# Altium PCB PROC091F_ASCII.PcbDoc (part 6 of 7)
Units mil, origin at the board's own origin, x right, y up, seen from the top; angles counter-clockwise.
Board outline 3590.95 x 906.17 mil, 8 copper layers (Top Layer, GND1, Sig1, PWR1, PWR2, Sig2, GND2, Bottom Layer), stack 63.146 mil thick; 420 components, 316 nets, 1432 pads, 774 vias.
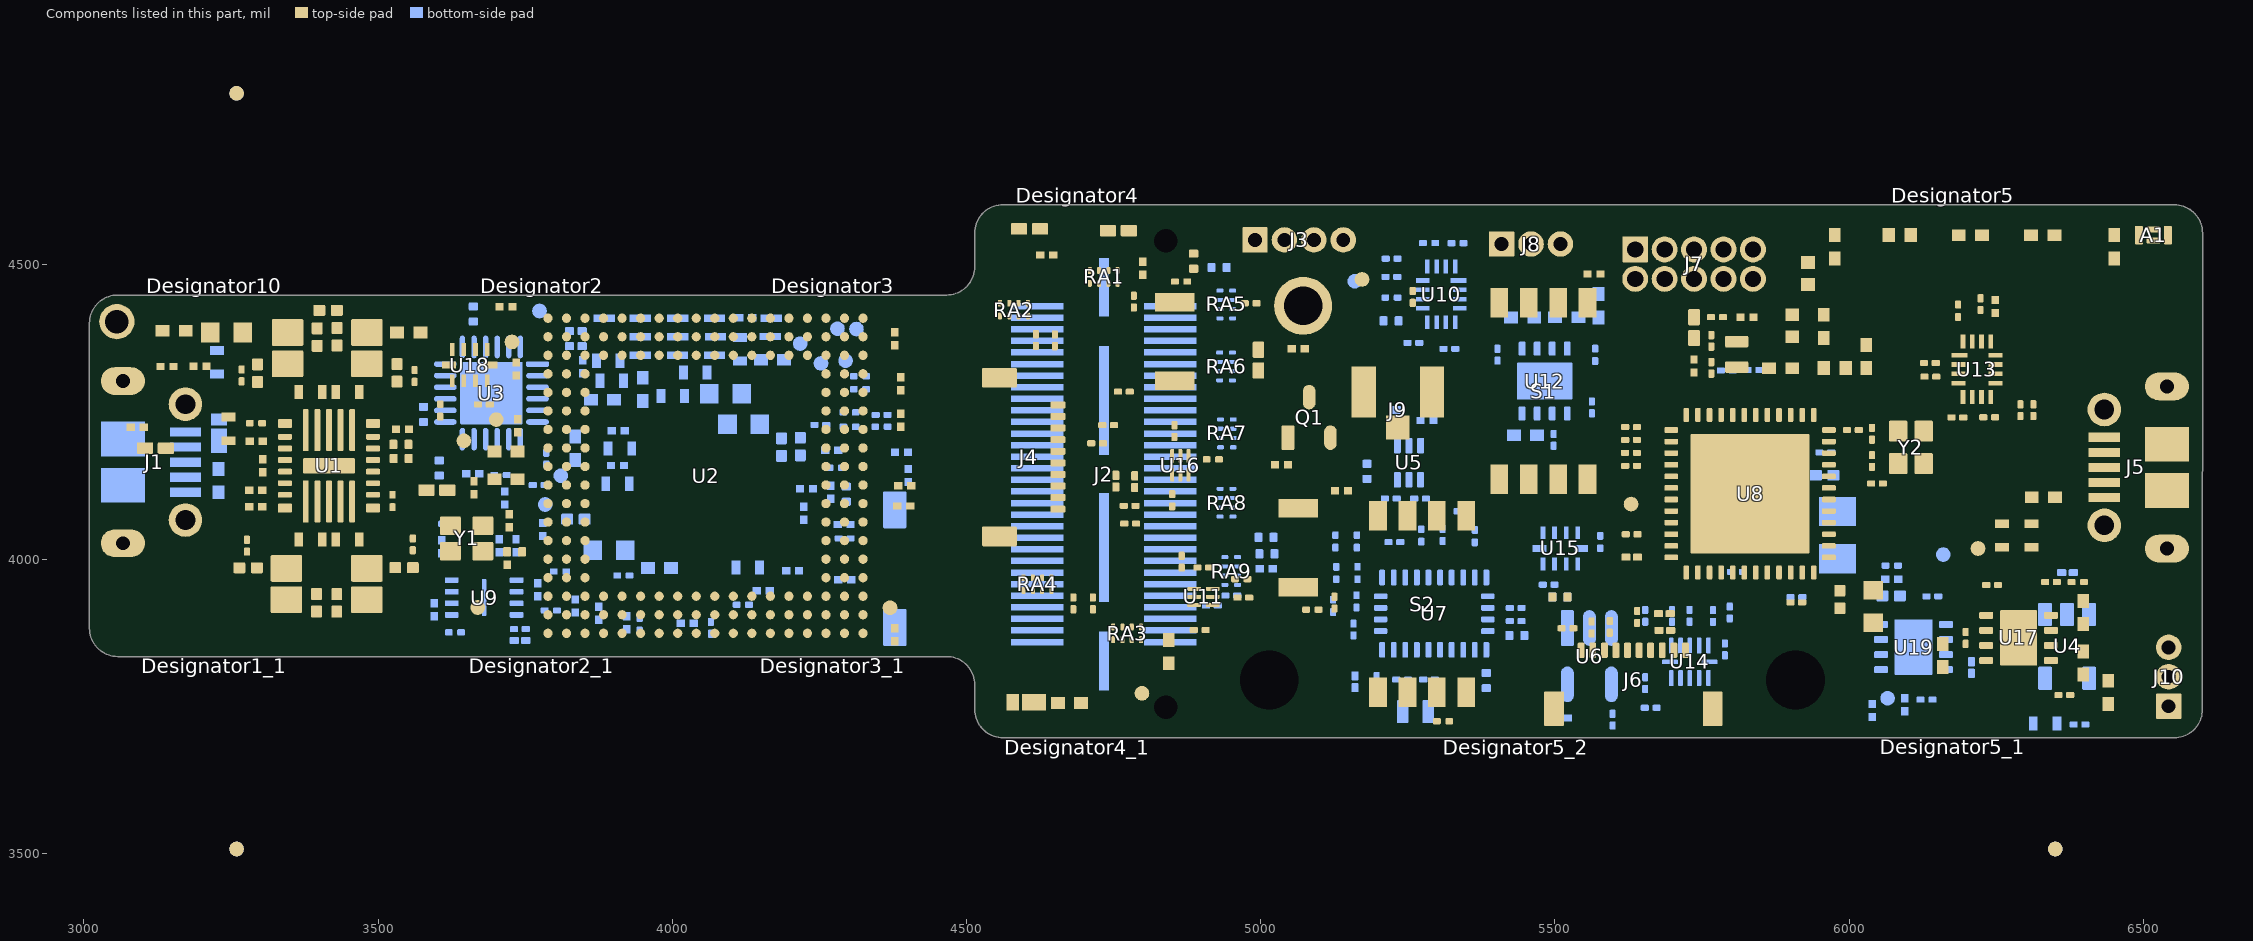
[diagram p12: the components of this part, seen from the top]

## Via types
v1: diameter 18, hole 8, Top Layer to Bottom Layer, tented both sides, 737 vias
v2: diameter 19.68, hole 7.87, Top Layer to Bottom Layer, tented both sides, 36 vias
v3: diameter 17, hole 8, Top Layer to Bottom Layer, tented both sides, 1 vias

## Nets (pads, with @x,y where several pads share a name; then routed paths per layer and width w, separated by ;. In a path a pad name is that pad's centre, name@x,y a point inside that pad or via, vN(x,y) a via of type N, cw(c..) or ccw(c..) an arc to the next point about the centre after c; other vN are vias at no path point) (continued)
pads on no net: A1.2-3 A1.5-6 Designator1. Designator1_1. Designator2. Designator2_1. Designator3. Designator3_1. Designator4. Designator4_1. Designator5. Designator5_1. Designator5_2. Designator6. Designator7. Designator8. Designator10. Designator22_1. Designator23. FID1.1 FID2.1 FID3.1 FID4.1 FID5.1 FID6.1 J1.4 J2.1 J2.3 J2.4 J2.5 J2.6 J2.7 J2.9 J2.MH1 J2.MH2 J4.4 J5.2 J5.3 J5.4 J6.4 J9.2@5173.9,4283.6 J9.3@5292.01,4283.6 RA2.1 RA2.8 RA5.4 RA5.5 S2.4 S2.5 U1. U2.A3 U2.A4 U2.B3 U2.B4 U2.B5 U2.C3 U2.C4 U2.C5 U3.10 U3.11 U3.14 U3.15 U3.16 U3.18 U3.19 U3.21 U3.22 U3.23 U3.24 U7.1 U7.7 U7.8 U7.12 U7.13 U7.15 U7.16 U7.18 U7.21 U7.22 U7.23 U7.24 U8.5 U8.6 U8.9 U8.10 U8.12 U8.18 U8.19 U8.20 U8.28 U8.32 U8.36 U8.37 U8.38 U8.39 U8.40 U8.41 U8.42 U8.43 U12.9@5457.58,4302.51 U12.9@5507.58,4302.51 U17.9@6287.97,3841 U17.9@6287.97,3891 U19.9@6109.37,3825.66 U19.9@6109.37,3875.27

## Polygon pours and split planes (outlines as drawn)
RE on Top Layer "Top Layer-RE" (solid, remove dead copper, pour order 493): 6540.72,4398.89 6564.34,4398.89 6564.34,4587.86 6540.72,4587.86
5V_IN_B on Top Layer "Top Layer-5V_IN_B" (solid, remove dead copper, pour order 491): 6197,4124 6206,4133 6276,4133 6318,4133 6325,4126 6325,4051 6321,4047 6205,4047 6197,4055
USB_5V_B on Top Layer "Top Layer-USB_5V_B" (solid, remove dead copper, pour order 489): 6338,4138.4 6378.89,4138.4 6395.42,4121.87 6402.92,4114.37 6470,4114.37 6476,4108.37 6476,4096.37 6471,4091.37 6338,4091.37 6338,4113.37
no net on Top Layer "Top Layer-No Net" (solid, remove dead copper, pour order 477): 6335,4190
GND on Top Layer " " (solid, remove dead copper, pour order 428): 6462.4,4602.09 6462.4,4476 6094.58,4476 6094.58,4239.36 5840,4239.36 5840,4602.01
GND on Top Layer " " (solid, remove dead copper, pour order 495): 6117.79,4247.89 6117.79,4457 6461.9,4457 6461.9,4318.4 6592,4318.4 6592,3727 6558.63,3693.63 6491,3693.63 4391.1,3693.98 4391.1,4599.81 5818.71,4599.81 5818.71,4287.56 5894.15,4212.11 6082.01,4212.11
GND on Top Layer " " (solid, remove dead copper, pour order 465): 3261.1,4211.1 3261.1,4188.61 3268.49,4181.22 3268.49,4153.29 3150.01,4153.29 3125.63,4177.67 3125.63,4270.32 3146.11,4290.8 3191.47,4290.8 3203.02,4279.24 3203.02,4230.58 3222.51,4211.1
PMICVIO_3V3 on Top Layer " " (solid, remove dead copper, pour order 463): 3143.65,4360.8 3179.4,4360.8 3193.27,4346.93 3193.27,4314.78 3144.6,4314.78 3143.39,4315.99
PMICOUT_3V3 on Top Layer " " (solid, remove dead copper, pour order 461): 4333.76,4153.15 4380.42,4153.15 4392.49,4141.09 4392.49,4117.8 4344.94,4117.8 4327.78,4134.97 4327.78,4146.94 4333.32,4152.48
GND on Top Layer " " (solid, remove dead copper, pour order 446): 4191,4208.15 4106.33,4292.82 3921,4292.82 3921,4016 4191,4016
GND on Top Layer " " (solid, remove dead copper, pour order 430): 3400.13,4047.5 3434.09,4047.5 3435.21,4046.38 3435.21,4007.29 3442,4000.5 3442,3933.2 3386,3933.2 3386,3994.7 3399,4007.7 3399.01,4045.26
GND on Top Layer " " (solid, remove dead copper, pour order 166): 3388.3,4371 3388.3,4316.69 3398.15,4306.84 3398.15,4268.85 3434.85,4269.05 3434.85,4310.34 3441,4316.49 3441,4371
GND on Top Layer " " (solid, remove dead copper, pour order 420): 5383.62,4493.86 5529.19,4493.86 5539.3,4483.75 5539.3,4470.64 5524.82,4456.16 5524.82,4413.01 5517.99,4406.18 5384.16,4406.18 5383.88,4405.9
PMICOUT_3V3 on Top Layer " " (solid, remove dead copper, pour order 396): 3578.7,4436.4 3583.4,4431.7 3583.4,4424.1 3588.9,4418.6 3588.9,4371.27 3557.7,4371.27 3557.7,4405 3541.7,4421 3541.7,4433.07 3545.03,4436.4
PMIC_1V2_FILTERED on Top Layer " " (solid, remove dead copper, pour order 376): 3100.9,4430.37 3096,4425.47 3096,4368.8 3102.63,4361.9 3134.6,4361.9 3149.8,4377.1 3149.8,4430.37
AR_1P2 on Top Layer " " (solid, remove dead copper, pour order 370): 3160.7,4373.3 3191.2,4373.3 3196.93,4367.57 3234.2,4367.57 3234.2,4428 3160.7,4428
PMIC_1V2 on Top Layer "Bottom Layer-PMIC_1V2" (solid, pour order 334): 3406.3,4384 3406.3,4410 3409.8,4413.4 3409.8,4433.17 3252.6,4433.16 3252.6,4361.52 3382,4361.52 3382,4375.99 3390.01,4384
PMIC_1V8 on Top Layer "Bottom Layer-PMIC_1V8" (solid, pour order 338): 3405.2,3921 3372,3921 3372,3952.1 3314,3952.1 3314,3863.25 3405.2,3863.25
5V_IN on Top Layer "Bottom Layer-5V_IN 2" (solid, pour order 346): 3332.61,4303.52 3332.61,4262.52 3372.61,4262.52 3374.61,4264.52 3374.61,4300.52 3371.61,4303.52
PMIC_3V3 on Top Layer "Bottom Layer-PMIC_3V3" (solid, pour order 336): 3539.58,4362.4 3545,4367.82 3545,4380.81 3545,4400.1 3537.2,4407.9 3420,4407.9 3420,4362.4
PMIC_1V0 on Top Layer "Bottom Layer-PMIC_1V0 1" (solid, pour order 340): 3456.41,3953.57 3456.41,3921 3420.5,3921 3420.5,3861.73 3569.79,3861.73 3569.79,3953.57
5V_IN on Top Layer "Bottom Layer-5V_IN 3" (solid, pour order 344): 3332.61,4053.02 3332.61,4012.02 3372.61,4012.02 3374.61,4014.02 3374.61,4050.02 3371.61,4053.02
5V_IN on Top Layer "Bottom Layer-5V_IN 1" (solid, pour order 352): 3500.61,4264.02 3500.61,4305.02 3460.61,4305.02 3458.61,4303.02 3458.61,4267.02 3461.61,4264.02
5V_IN on Top Layer "Bottom Layer-5V_IN 4" (solid, pour order 342): 3500.61,4013.52 3500.61,4054.52 3460.61,4054.52 3458.61,4052.52 3458.61,4016.52 3461.61,4013.52
5V_IN on Top Layer "Top Layer-5V_IN" (solid, pour order 368): 3203.3,4295.75 3209.51,4289.54 3209.51,4241.99 3217.3,4234.2 3221.47,4230.03 3264.77,4230.03 3264.77,4249.23 3264.77,4343.3 3203.3,4343.3
PMICOUT_3V3 on Top Layer "TOP-PMICOUT_3V3" (solid, remove dead copper, pour order 194): 4858.29,3846.65 4858.29,3928.41 4858.29,3946.33 4808.29,3996.33 4773.82,3996.33 4767,3989.51 4767,3934.57 4808.29,3893.28 4808.29,3853.17 4814.8,3846.65
5V_IN on Top Layer "TOP-5V_IN 1" (solid, pour order 184): 4527.77,3777.41 4588.97,3777.41 4588.97,3712.81 4527.77,3712.81
NetD2_2 on Top Layer "TOP-NetD2_2" (solid, pour order 180): 4603.5,3789.43 4657.11,3789.43 4668.11,3778.43 4668.11,3724.76 4662.83,3719.49 4610.48,3719.49 4603.5,3726.47
no net on Top Layer "TOP-No Net 2" (solid, pour order 332): 6159.44,4021.48
VCC_BA_3V3 on Top Layer "TOP-VCC_BA_3V3" (solid, pour order 186): 4830.39,3829.83 4860.96,3829.83 4860.96,3775.05 4859.25,3773.34 4827.36,3773.34 4814.82,3785.87 4814.82,3822.44 4822.21,3829.83
5V_IN_SW on Top Layer "TOP-5V_IN_SW" (solid, pour order 182): 4687.48,3786.45 4727.09,3786.45 4741.77,3771.77 4741.77,3725.03 4724.97,3708.22 4682.94,3708.22 4682.94,3781.58
no net on Top Layer "TOP-No Net" (solid, pour order 178): 6163.15,4205.41
RE on Bottom Layer "Bottom Layer-RE" (solid, remove dead copper, pour order 499): 6564.31,4399 6540.69,4399 6540.69,4587.98 6564.31,4587.98
GND on Bottom Layer " " (solid, remove dead copper, pour order 483): 6460,4317.9 6593,4317.9 6593,3722 6567.2,3696.2 6403.68,3696.2 4390.55,3696.54 4390.55,4602.37 6460,4602.37
PMIC_1V0 on Bottom Layer "Bottom Layer-PMIC_1V0" (solid, remove dead copper, pour order 208): 4092.38,4270.62 4099,4264 4117.89,4264 4130.35,4251.54 4130.35,4214.97 4133.62,4211.53 4157.89,4211.53 4176.45,4193.57 4223.58,4193.57 4229.44,4199.44 4229.44,4211.53 4229.44,4293.05 4202.46,4320.04 4092.38,4320.04
GND on Bottom Layer " " (solid, remove dead copper, pour order 475): 3855.4,4434.66 3943.27,4434.66 3943.27,4354.12 3904.58,4354.12 3889.38,4338.92 3889.38,4292.14 3870.15,4292.14 3869.18,4293.11 3869.18,4319.97 3862.3,4326.86 3846.51,4326.86 3845.29,4328.08 3845.29,4344.09 3855.4,4354.2
VCLK_1V8 on Bottom Layer "BOTTOM-VCLK_1V8" (solid, remove dead copper, pour order 234): 3904.31,4184.76 3904.31,4177.71 3900.3,4173.7 3884.7,4173.7 3882.3,4176.1 3882.3,4183.63 3881.18,4184.76 3815,4184.76 3815,4324 3857.74,4324 3857.74,4292.99 3865.06,4285.68 3873.32,4285.68 3876,4282.72 3876,4231 3904.31,4231
GND on Bottom Layer "Bottom Layer-GND" (solid, remove dead copper, pour order 459): 4122.79,4434.87 4123.42,4403.12 4126.97,4399.57 4126.97,4327.5 4076.38,4327.5 4076.41,4434.87
GND on Bottom Layer "Bottom Layer-GND 1" (solid, remove dead copper, pour order 454): 4039.05,4265.4 4039.05,4433.84 4013.12,4433.84 4013.07,4265.4
GND on Bottom Layer "BOTTOM-GND 1" (solid, remove dead copper, pour order 220): 4223.9,4105.7 4227.1,4108.9 4227.1,4200.2 4065.46,4200.2 4065.46,4221.1 4061.14,4225.42 3946.37,4225.42 3946.37,4017.76 3948.37,4015.76 4203.3,4015.76 4203.3,4099.8 4209.2,4105.7
AR_1V8 on Bottom Layer " " (solid, remove dead copper, pour order 212): 3882,4229.79 3928.75,4229.79 3928.75,4280.65 3887.42,4280.65 3887.42,4264.15 3882,4258.74
no net on Bottom Layer " " (solid, remove dead copper, pour order 452): 4514.15,4464.37
GND on Bottom Layer " " (solid, remove dead copper, pour order 444): 3110.02,4464.37 3516.63,4464.37 3524,4457 3524,3995 3572,3947 3571,3946 3571,3834.46 3009.58,3834.46 3007,3837.04 3007,3956.14 3242.4,3956.14 3293,4006.74 3293,4336 3286,4343 3110.02,4343
5V_IN on Bottom Layer " " (solid, remove dead copper, pour order 442): 5372.93,4241.23 5372.93,4218.21 5399.81,4191.33 5443.81,4191.33 5443.81,4218.26 5420.84,4241.23
no net on Bottom Layer " " (solid, remove dead copper, pour order 440): 5395.85,4242.93
PMICOUT_3V3 on Bottom Layer "Bottom Layer-PMICOUT_3V3" (solid, remove dead copper, pour order 434): 4002.93,3945.37 4022.3,3925.99 4022.3,3871.07 4000.71,3849.47 3984.65,3849.47 3972.61,3861.52 3972.61,3890.23 3968.59,3894.25 3912.61,3894.25 3895.73,3911.13 3853.93,3911.13 3842.3,3922.76 3794.48,3922.76 3794.48,3968.8 3849.6,3968.8 3849.6,3945.37
GND on Bottom Layer "TOP-GND 1" (solid, remove dead copper, pour order 432): 3201.16,4249.63 3201.16,4448.76 3021.38,4448.76 3021.38,3991.45 3045.02,3967.81 3228.75,3967.81 3240.08,3979.14 3240.08,4092.57 3213.15,4119.5 3114.15,4119.5 3110.56,4123.1 3110.56,4154.46 3110.56,4243.98 3116.94,4250.83 3141.88,4250.83 3152.4,4240.31 3191.84,4240.31
no net on Bottom Layer " " (solid, remove dead copper, pour order 416): 3587.57,4371.27
no net on Bottom Layer " " (solid, remove dead copper, pour order 398): 3587.57,4371.27
AR_1V8 on Bottom Layer "Bottom Layer-AR_1V8" (solid, pour order 374): 4178,4325.46 4178,4351.06 4242.56,4351.06 4255.37,4338.24 4255.37,4320.81 4205.03,4320.81 4200.37,4325.46
5V_IN on Bottom Layer "Bottom Layer-5V_IN" (solid, remove dead copper, pour order 372): 3207,4317 3207,4299.06 3201.77,4293.83 3201.77,4225.23 3275.77,4225.23 3275.77,4322.2 3212.2,4322.2
NetD1_2 on Bottom Layer "Bottom Layer-NetD1_2" (solid, remove dead copper, pour order 354): 3205.06,4138.73 3205.06,4217.16 3252.84,4217.16 3252.84,4138.73
USB_5V on Bottom Layer "Bottom Layer-USB_5V" (solid, remove dead copper, pour order 326): 3143.37,4122.78 3209.76,4122.78 3213.9,4126.93 3240.58,4126.93 3240.58,4086.12 3208.69,4086.12 3196.02,4098.78 3143.37,4098.78
PMIC_1V8 on Bottom Layer "BOTTOM-PMIC_1V8 1" (solid, remove dead copper, pour order 214): 3872.59,3942.39 3887.8,3957.6 3887.8,3967.64 3887.8,3992.9 3884.12,3996.58 3884.12,4079.43 3838.37,4079.43 3838.37,3998.24 3838.37,3979.64 3838.88,3963.12 3859.61,3942.39
BB_1V8 on Bottom Layer "Bottom Layer-BB_1V8" (solid, remove dead copper, pour order 324): 4129.35,4407.73 4135.08,4402.01 4135.08,4354.75 4127.11,4346.78 4103.27,4346.78 4103.27,4328.02 4162.87,4328.02 4162.87,4434.77 4129.35,4434.77
AR_VOUT_PA on Bottom Layer "Bottom Layer-AR_VOUT_PA" (solid, remove dead copper, pour order 322): 3901.93,4289 3973.82,4289 3973.82,4434.64 3948.08,4434.64 3948.08,4351 3901.93,4351
AR_1P0_RF2 on Bottom Layer "Bottom Layer-AR_1P0_RF2" (solid, remove dead copper, pour order 318): 3963.8,4285.5 3972.6,4294.3 3972.6,4316.74 3979.83,4323.97 3979.83,4434.54 4004.92,4434.54 4004.92,4266.88 4013.78,4258.02 4110.46,4258.02 4110.46,4211.45 3938.58,4211.45 3938.58,4285.5
AR_1P0_RF1 on Bottom Layer "Bottom Layer-AR_1P0_RF1" (solid, remove dead copper, pour order 316): 4078.8,4266.48 4078.8,4328.27 4069.71,4337.42 4069.71,4434.87 4047.32,4434.87 4047.32,4266.48
VCO_1V8 on Bottom Layer "BOTTOM-VCO_1V8" (solid, remove dead copper, pour order 216): 3877.1,4169.4 3879.6,4166.9 3880.7,4166.83 3904,4166.83 3904,4115.29 3858.83,4115.29 3841.37,4132.76 3841.37,4145.76 3834.37,4152.76 3823.37,4152.76 3823.37,4182.24 3872.16,4182.24 3877.1,4177.3
5V_IN_SW on Bottom Layer "BOTTOM-5V_IN_SW" (solid, pour order 314): 6204.14,3845.14 6152,3845.14 6152,3829.3 6184.9,3829.3 6194.46,3819.74 6201.27,3819.74 6214.64,3819.74 6227.76,3806.61 6228.14,3780.46 6259.4,3749.2 6306.1,3749.2 6314,3757.1 6314,3802 6309,3807 6289,3807 6270.12,3807 6265.37,3811.75 6265.37,3844 6261,3848 6207,3848
5V_HD_IN on Bottom Layer "BOTTOM-5V_HD_IN" (solid, pour order 312): 6136.34,3818.2 6186,3818.2 6198,3806.2 6198,3719.23 6186.95,3708.18 6148.42,3708.18 6136.34,3720.26
5V_IN_B on Bottom Layer "BOTTOM-5V_IN_B" (solid, pour order 266): 6150.95,3923.95 6168.05,3906.85 6178,3896.9 6177.89,3880.17 6174.12,3876.4 6145.16,3876.4 6145.15,3856.3 6204.5,3856.3 6224.8,3876.6 6224.8,3983.2 6267,4025.4 6267,4114 6261,4120 6190,4120 6183,4113 6183,4071.4 6147.37,4035.77 6147.37,3927.53 6149.7,3925.2
5V_HD_IN on Bottom Layer "BOTTOM-5V_HD_IN 1" (solid, pour order 264): 4798.68,3865.13 4891.75,3865.13 4895,3861.88 4895,3789.79 4874.5,3789.79 4874.5,3806.35 4853.33,3827.52 4799.46,3827.52 4791.67,3835.3 4791.67,3858.12
no net on Bottom Layer "BOTTOM-No Net 3" (solid, pour order 262): 4918.91,3816.49
no net on Bottom Layer "BOTTOM-No Net 4" (solid, pour order 254): 4983.76,3878.78
no net on Bottom Layer "BOTTOM-No Net" (solid, pour order 252): 4304.65,4371.57
no net on Bottom Layer "BOTTOM-No Net 1" (solid, remove dead copper, pour order 250): 4033.37,4452.75
VIOIN_1V8 on Bottom Layer "BOTTOM-VIOIN_1V8" (solid, remove dead copper, pour order 230): 3990.37,4003.76 4117.79,4003.76 4117.79,3965.76 3990.37,3965.76
AR_1V8 on Bottom Layer "BOTTOM-AR_1V8" (solid, remove dead copper, pour order 210): 3914,4112 3916.2,4109.8 3936.13,4109.8 3936.13,4014.99 3952.88,3998.24 3972.37,3998.24 3972.37,3968.76 3925.86,3968.76 3891.86,4002.75 3891.86,4112
5V_IN_SW on PWR1 "PWR1-5V_IN_SW" (solid, remove dead copper, pour order 380): 6460,4594 5576,4594 5576,4332 5573.19,4333.81 5443.38,4204 5342,4204 5168,4378 4799.73,4378 4635,4213.27 4635,3697.46 4787.37,3697.46 4787.37,4055.46 5593,4055.46 5685.13,4147.6 6063.4,4147.6 6208.37,4002.63 6208.37,3915.48 6208.37,3699.46 6212.37,3695.46 6600.27,3697.49 6600.27,4318.3 6460,4318.3
5V_IN on PWR1 " " (solid, remove dead copper, pour order 424): 4772.01,4379.61 5180.02,4379.61 5339.66,4219 5561.97,4219 5562.03,4602.1 4675.1,4602.1 4525.19,4452.19 4525.19,3711.47 4631,3711.47 4631,4238.6
PMIC_1V2_FILTERED on PWR1 " " (solid, remove dead copper, pour order 414): 3081.05,4368.79 3181.54,4368.79 3220.45,4329.88 3220.45,4278.41 3246.29,4253.3 4220.68,4253.3 4220.68,4082.23 3738.33,4082.23 3738.33,3834.46 4441,3834.46 4441,4479.05 3081.05,4479.05
PMIC_1V0 on PWR1 " " (solid, remove dead copper, pour order 410): 3579.52,3834.32 3706.3,3834.32 3728.18,3856.2 3728.18,3976.65 3735.92,3985.74 3753.02,4002.3 3785.58,4034.86 3816.78,4034.86 3823.42,4028.23 4160.28,4028.23 4217,4084.96 4217,4319.77 3964.71,4319.77 3942.89,4297.89 3709.16,4297.89 3549.35,4138.08 3549.76,4055.03 3427,4055.03 3427,3832.13
PMICVIO_3V3 on PWR1 " " (solid, remove dead copper, pour order 436): 3141.44,4363.71 3183.96,4363.71 3185.46,4362.21 3185.46,4340.46 3180.45,4335.44 3145.7,4335.44 3141.19,4339.96
5V_HD_IN on PWR1 "PWR1-5V_HD_IN" (solid, remove dead copper, pour order 366): 5560.3,4032.46 5616.87,4032.46 5709.3,4124.9 6042.1,4124.9 6200.37,3966.63 6200.37,3911.2 6200.37,3696.46 4809.37,3696.46 4809.37,4032.46
no net on PWR1 "L4 PWR/GND-No Net" (solid, pour order 364): 3990.62,3973.27
GND on Sig1 " " (solid, remove dead copper, pour order 422): 6460,4568 6486,4568 6486,4533 6460,4533 6460,4318.3 6578,4318.3 6578,3696.46 4514.15,3696.46 4514.15,4605.43 6460,4602.79
GND on Sig1 " " (solid, remove dead copper, pour order 457): 3009.58,4448.76 4380.91,4448.76 4380.91,3834.46 3009.58,3834.46
no net on Sig1 "Sig1-No Net" (solid, remove dead copper, pour order 467): 4088.43,4327.31
no net on Sig1 "L3 SIG 1-No Net" (solid, pour order 286): 3904.98,3968.25
GND on GND1 "GND1-GND" (solid, remove dead copper, pour order 358): 6461.95,4318.4 6592,4318.4 6592,3731 6557.46,3696.46 6403.15,3696.46 4522.29,3696.46 4522.29,3843 3009.59,3843 3010,4451.17 4522,4451.17 4522,4602.1 6462.12,4602.1
no net on GND1 "L6 SIG 2-No Net" (solid, pour order 302): 4825.92,3926.28
no net on GND1 "DVDD_21MP_1V8_L08_P-001" (solid, remove dead copper, pour order 300): 3885.7,4256.64
GND on Sig2 " " (solid, remove dead copper, pour order 438): 6460,4318.1 6587.8,4318.1 6587.8,3725.8 6558.46,3696.46 6403.68,3696.46 4514.15,3696.46 4514.15,4602.37 6460,4602.09
GND on Sig2 " " (solid, remove dead copper, pour order 455): 3009.58,3834.46 3009.58,4448.76 3879.97,4448.76 3880.04,4448.69 3880.04,4344.3 3857.77,4322.03 3857.77,4183.05 3837.69,4162.97 3514.11,4162.97 3449.26,4098.12 3449.26,3833.82
GND on Sig2 " " (solid, remove dead copper, pour order 450): 3946,4059 3946,4264 3971,4289 4166.06,4289 4180,4275.06 4180,4011 4161.3,4011 4128.3,3978 4046,3978 4046,4038 4031.47,4052.53 3952.19,4052.53 3952.19,4053.61 3950,4055.8
AR_1V8 on Sig2 " " (solid, remove dead copper, pour order 426): 3873,4353 4232,4353 4232,4303.36 4226.81,4298.16 3937.21,4298.16 3937.21,4036.72 3873,4036.72
PMICOUT_3V3 on Sig2 "Sig2-PMICOUT_3V3" (solid, remove dead copper, pour order 418): 3572.53,3970.25 3572.53,4012.87 3623.66,4064 3653.69,4094.03 3653.69,4152.2 3646.43,4159.46 3526.74,4159.46 3451.99,4084.71 3452,4019.78 3553.65,3918.12 3572.53,3899.24 3626.57,3899.24 3655.68,3870.12 3776.74,3870.12 3856.78,3950.17 3853.77,3950.17 3840.25,3963.68 3675.96,3963.68 3673.49,3961.21 3581.57,3961.21
GND on Sig2 "Sig2-GND" (solid, remove dead copper, pour order 356): 6403.37,3696.46
VCC_BA_3V3 on PWR2 "PWR2-VCC_BA_3V3" (solid, remove dead copper, pour order 487): 6460,4318.1 6590,4318.1 6590,3720.8 6565.66,3696.46 6403.15,3696.46 4514.14,3696.46 4514.15,4602.1 6460,4602.1
5V_IN on PWR2 " " (solid, remove dead copper, pour order 485): 4597,4100 4573.8,4123.2 4462.7,4122.8 4327.06,4122.8 4302,4147.86 4302,4211.85 4271.3,4229.17 3971.19,4229.17 3910.94,4289.43 3739.45,4289.43 3706.1,4256.08 3706.1,4178.63 3652.53,4125.06 3616.89,4125.06 3605.42,4136.53 3605.42,4222.9 3515.65,4312.67 3515.76,4378.01 3515.76,4432.4 3198.19,4432.4 3198.19,3952.63 3864.68,3952.63 3932.69,4020.64 4127.7,4020.64 4153.58,3994.76 4193.24,3994.76 4229.16,3958.84 4262.42,3957.75 4286.21,3957.75 4322,3921.96 4322,3876.09 4353.26,3844.83 4413.43,3844.83 4439.46,3818.81 4453.67,3818.32 4524.36,3818.32 4529.66,3813.02 4529.66,3715.56 4542.09,3703.14 4743.98,3703.14 4743.98,3847.78 4597,3994.76
PMIC_1V8 on PWR2 "PWR2-PMIC_1V8" (solid, remove dead copper, pour order 408): 3465.34,3966.41 3477.2,3978.26 3537.59,3978.27 3549.67,3966.41 3675.7,3966.41 3707.69,3998.39 3770.3,4061 3870.8,4061 3923.48,4008.32 3923.48,3971.82 3784.28,3832.62 3321.9,3832.62 3321.9,3939.88 3413.11,3939.88 3439.64,3966.41
PMICOUT_3V3 on PWR2 " " (solid, remove dead copper, pour order 402): 4579.6,4126.82 4610.8,4095.62 4611.23,4071.6 4610.88,3988.27 4674.1,3925.05 4803.53,3925.05 4803.53,4471.18 3554,4471.18 3533.3,4449.2 3533.3,4323.11 3545.61,4310.8 3545.61,4215 3545.94,4191.06 3601,4136 3647.82,4136 3683.51,4171.69 3683.51,4257.46 3728.27,4302.22 3926.07,4302.22 3988.19,4240.11 4270.16,4240.11 4301.92,4208.35 4301.92,4163.3 4332.23,4133 4415.98,4133 4422.16,4126.82
VIOIN_1V8 on PWR2 "PWR2-VIOIN_1V8" (solid, remove dead copper, pour order 382): 4282.76,3946.1 4220.49,3946.1 4182.83,3983.77 4150.56,3983.77 4124.13,4011.02 3956.82,4011.02 3876.24,3930.44 3806.05,3930.44 3784.21,3908.6 3784.21,3853.04 3800.87,3836.38 4223.5,3836.38 4269.97,3836.6 4310.66,3877.29 4310.66,3918.2
no net on PWR2 " " (solid, remove dead copper, pour order 406): 3419.66,3833.17
VDDS on PWR2 "PWR2-VDDS" (solid, remove dead copper, pour order 404): 5626.72,4273.46 6074.99,4273.46 6074.99,3989.08 6021.81,3935.9 5700.14,3935.9 5626.72,4006.46
no net on Bottom Solder " " (solid): 4167.33,4185.94 4167.33,4145.41 4201.1,4145.41 4201.1,4016.38 4141,4016.38 3946.06,4016.38 3946.06,4226.44 4065.13,4226.39 4065.13,4185.94
no net on Bottom Solder " " (solid): 4441.36,3932.89 4426.11,3932.89 4407,3952 4407,4017.59 4430.02,4040.6 4509.91,4040.6 4517,4033.51 4517,4010.42 4514.12,4007.54 4514.12,3932.89
no net on Bottom Solder " " (solid, remove dead copper): 4514.15,4464.37
no net on Bottom Solder " " (solid): 4524.01,4436.06 4523.99,4070 4416,4070 4416,4149 4423,4156 4423,4272 4391.25,4303.75 4391.25,4436.06
no net on Bottom Solder " " (solid, remove dead copper): 4512,4464.37
no net on Top Paste " " (solid): 4115.99,4281.29 4185.42,4211.86 4185.42,4162.8 4066.99,4162.8 4066.99,4281.29
no net on Top Paste " " (solid): 3923.88,4165.3 3923.88,4283.79 4042.31,4283.79 4042.31,4165.3
no net on Top Paste " " (solid): 4066.88,4023.15 4066.88,4141.65 4185.31,4141.65 4185.31,4023.15
no net on Top Paste " " (solid): 3922.68,4025.44 3922.68,4143.93 4041.11,4143.93 4041.11,4025.44
no net on M1 Board Outline " " (solid, remove dead copper): 3143.52,4361.87
no net on M1 Board Outline " " (solid, remove dead copper): 3145.55,4361.06
no net on Top Overlay (solid, remove dead copper): 6039.68,3802.89
GND on GND2 "GND 3-GND" (solid, remove dead copper, pour order 310): 6592,4318.4 6592,3734 6553.59,3695.59 6407.19,3695.59 5808.37,3696.46 5113.76,3696.46 5113.76,3832.98 5059.11,3887.63 4965.39,3887.63 4911.96,3834.2 4911.96,3696.46 4522.31,3696.46 4522.31,3842.62 3017.74,3842.62 3009.58,3842.62 3009.41,4456.16 4522.77,4456.16 4522.77,4602.1 5954.75,4602.1 6460,4602.1 6460,4318.4
no net on Top Solder " " (solid): 3923.88,4165.3 3923.88,4283.79 4042.31,4283.79 4042.31,4165.3
no net on Top Solder " " (solid): 3922.68,4025.44 3922.68,4143.93 4041.11,4143.93 4041.11,4025.44
no net on Top Solder " " (solid): 4066.88,4023.15 4066.88,4141.65 4185.31,4141.65 4185.31,4023.15
no net on Top Solder " " (solid): 4115.99,4281.29 4185.42,4211.86 4185.42,4162.8 4066.99,4162.8 4066.99,4281.29

## Keep-outs
Keep-Out Layer:
  circle w1: c5014.62,3794.28 r118.11
  circle w1: c5908.96,3794.29 r118.11
  text ".Layer_Name" at 577,-858.49 h60

## Other copper
Top Layer:
  text ".Layer_Name" at 577,-858.49 h60
GND1:
  text ".Layer_Name" at 577,-858.49 h60
Sig1:
  text ".Layer_Name" at 577,-858.49 h60
PWR1:
  text ".Layer_Name" at 577,-858.49 h60
PWR2:
  text ".Layer_Name" at 577,-858.49 h60
Sig2:
  text ".Layer_Name" at 577,-858.49 h60
GND2:
  text ".Layer_Name" at 577,-858.49 h60
Bottom Layer:
  text ".Layer_Name" at 577,-858.49 h60

## Silkscreen, mask and mechanical layers (free items; w line width, h text height)
Top Overlay:
  drawing of 942 lines, arcs and shapes, not listed
  text "ANT" at 6478,4579 h15
  text "GND" at 5114.35,4578.4 h15
  text "3V3" at 4950.98,4577.16 h15
  text "USR_LED" at 4818.7,4574.89 h13
  text "CAN1" at 5291,4570 h15
  text "BT_JTAG_HDR" at 5651.88,4570 h15
  text "GND" at 5437.65,4569.42 h15
  text "CAN_H" at 5553.75,4514 h15 r90
  text "3V3" at 4565.47,4510.99 h15
  text "CAN_L" at 5377,4511.33 h15 r90
  text "SCL" at 5029.42,4491.93 h15
  text "SDA" at 5084.28,4492.38 h15
  text "LED" at 4572.72,4480.79 h15
  text "60PIN" at 5447,4475 h15
  text "60PIN/BT" at 5268.65,4473.69 h15
  text "'.PRJ_Number'" at 6342.3,4375.7 h25
  text "CLK_P" at 5208,4367.94 h15
  text "GND" at 3073.5,4351.94 h15
  text "BT_LED" at 5700.07,4342.76 h15 r90
  text "REV. F" at 6363.8,4337.7 h25
  text "RST_LED" at 4958.17,4278.44 h15 r90
  text "RST_SW" at 4817.5,4253.69 h15
  text "5V_LED" at 3052,4164 h15 r90
  text "USB2" at 6325,4156 h15
  text "USB_LED" at 3577.15,4153.31 h15
  text "'.PRJ_Number'" at 3029.24,4120.74 h25
  text "CAN" at 5189,4116.73 h15 r90
  text "BT_EN" at 5304.77,4112.88 h15 r90
  text "60PIN" at 5260.34,4106.72 h15 r90
  text "REV. F" at 3031.28,4071.44 h25
  text "BT" at 5460,4056 h15 r90
  text "SOP1" at 5596.27,4055.51 h15 r90
  text "LCD_DISP2" at 4703.55,4054.67 h15 r90
  text "SOP0" at 5498.3,4045.43 h15 r90
  text "CP2105" at 5420.83,4014.52 h15 r90
  text "USR_SW" at 4995.68,3986.37 h15 r90
  text "LCD_DISP1" at 5562.98,3934.67 h15
  text "3V3" at 3607.22,3910.87 h15
  text "CAN2" at 6434.2,3903.8 h15
  text "CAN_H" at 6435.3,3856.4 h15
  text "GND" at 6494.2,3778.1 h15 r90
  text "CAN_L" at 6443.5,3713 h15
  text "SPI" at 5110,3712.15 h15
  text "BT_DIS" at 5354.22,3711.85 h15
  text "BT/LCD" at 5195.38,3707.13 h15
  text ".Layer_Name" at 557.88,-855.15 h60
Bottom Overlay:
  lines w6: 3211.17,4086.81 3211.17,4074.59 3224.09,4087.51 3211.87,4087.51 ; 3800.91,4331.51 3809.55,4322.87 3809.55,4341.13 3800.91,4332.49 ; 4344.51,4118.42 4332.29,4118.42 4345.21,4131.33 4345.21,4119.11 ; 4566.51,3859.44 4557.87,3850.8 4557.87,3869.06 4566.51,3860.42 ; 4990.16,4510.8 4981.52,4502.16 4999.78,4502.16 4991.14,4510.8 ; 5184.91,3825.15 5172.69,3825.15 5185.61,3812.24 5185.61,3824.46 ; 5205.33,4193.17 5196.69,4184.53 5196.69,4202.79 5205.33,4194.15 ; 5367.37,4475.76 5376.01,4467.12 5376.01,4485.39 5367.37,4476.74 ; 5452.25,4061.61 5443.61,4052.97 5443.61,4071.24 5452.25,4062.6 ; 5498.49,3885.48 5489.85,3876.84 5489.85,3895.1 5498.49,3886.46 ; 5520.3,4218.07 5511.65,4209.43 5529.92,4209.43 5521.28,4218.07 ; 5761.65,3767.96 5753.01,3759.32 5771.27,3759.32 5762.63,3767.96 ; 6025.34,3813.5 6016.7,3804.86 6016.7,3823.12 6025.34,3814.48 ; 6303,3920 6294.36,3911.36 6294.36,3929.62 6303,3920.98 ; 3593.1,3881.3 3606.02,3868.39 3606.02,3880.61 3605.32,3881.3 3593.1,3881.3
  lines w7.64: 3176.91,3867.53 3235.33,3968.73 3293.76,3867.53 3176.91,3867.53
  text "S/N:" at 6579.7,4509 h40
  text "For evaluation only;" at 6527,4410 h30
  text "not FCC approved for resale." at 6528,4360 h30
  text "GND" at 5087.44,4355.96 h15
  text "OPN:" at 6372.5,4229.5 h40
  text "USB1" at 3155.09,3966.74 h15
  text "S3" at 4283.72,3874.95 h25 r270
  text "SOP2" at 4443.82,3859.98 h15 r270
  text ".Layer_Name" at 577,-858.49 h60
Top Paste:
  text ".Layer_Name" at 577,-858.49 h60
Bottom Paste:
  text ".Layer_Name" at 577,-858.49 h60
Top Solder:
  text ".Layer_Name" at 577,-858.49 h60
  text ".Layer_Name" at 577,-858.49 h60
Bottom Solder:
  text ".Layer_Name" at 577,-858.49 h60
Drill Guide:
  text ".Layer_Name" at 577,-858.49 h60
M1 Board Outline:
  lines w10: 3057.58,3741.94 ccw(c3057.58,3693.94) 3009.58,3693.94 3009.58,3455.37 ccw(c3057.58,3455.37) 3057.58,3407.37 6552.3,3407.37 ccw(c6552.3,3455.37) 6600.3,3455.37 6600.3,3556.22 ccw(c6552.3,3556.22) 6552.3,3604.22 4488.37,3604.22 cw(c4488.37,3652.22) 4440.37,3652.22 4440.37,3693.94 ccw(c4392.37,3693.94) 4392.37,3741.94 3060,3741.94 ; 3057.58,4541.26 cw(c3057.58,4589.26) 3009.58,4589.26 3009.58,4843.47 cw(c3057.58,4843.47) 3057.58,4891.47 6552.3,4891.47 cw(c6552.3,4843.47) 6600.3,4843.47 6600.3,4742.62 cw(c6552.3,4742.62) 6552.3,4694.62 5943,4694.62 cw(c5943,4742.62) 5895,4742.62 5895,4750.95 ccw(c5847,4750.95) 5847,4798.95 4954.37,4798.95 ccw(c4954.37,4750.95) 4906.37,4750.95 4906.37,4742.62 cw(c4858.37,4742.62) 4858.37,4694.62 4488.37,4694.62 ccw(c4488.37,4646.62) 4440.37,4646.62 4440.37,4589.26 cw(c4392.37,4589.26) 4392.37,4541.26 3060,4541.26 ; 4390,3741.94 4390.37,3741.94 ; 4562.14,3696.46 cw(c4562.14,3744.46) 4514.14,3744.46 4514.14,3786.46 ccw(c4466.14,3786.46) 4466.14,3834.46 3057.58,3834.46 cw(c3057.58,3882.46) 3009.58,3882.46 3009.58,4400.76 cw(c3057.58,4400.76) 3057.58,4448.76 4466.15,4448.76 ccw(c4466.15,4496.76) 4514.15,4496.76 4514.15,4554.37 ; 4562.14,3696.51 6552.27,3696.2 ccw(c6552.27,3744.2) 6600.27,3744.2 ; 6600.29,3744.2 6600.53,4554.1 ccw(c6552.53,4554.1) 6552.53,4602.1 4562.15,4602.33 ccw(c4562.15,4554.37) 4514.15,4554.37 ; 4441.36,3957.89 ccw(c4466.36,3957.89) 4466.36,3932.89 4489.12,3932.89 ; 4441.36,3957.89 4441.36,3957.89 ; 4441.36,3957.89 4441.36,3982.54 cw(c4466.36,3982.54) 4466.36,4007.54 ; 4441.37,4316.3 ccw(c4466.37,4316.3) 4466.37,4291.3 4489.13,4291.3 ; 4441.37,4316.3 4441.37,4316.3 ; 4441.37,4316.3 4441.37,4340.95 cw(c4466.37,4340.95) 4466.37,4365.95 ; 4466.36,4007.54 4489.12,4007.54 cw(c4489.12,3982.54) 4514.12,3982.54 4514.12,3957.89 cw(c4489.12,3957.89) 4489.12,3932.89 ; 4466.36,4007.54 4466.36,4007.54 ; 4466.36,4106.32 cw(c4466.36,4131.32) 4441.36,4131.32 4441.36,4160.46 cw(c4466.36,4160.46) 4466.36,4185.46 4489.13,4185.46 ; 4466.36,4106.32 4466.36,4106.32 ; 4466.36,4106.32 4489.13,4106.32 ccw(c4489.13,4131.32) 4514.13,4131.32 4514.13,4160.46 ccw(c4489.13,4160.46) 4489.13,4185.46 ; 4466.37,4365.95 4466.37,4365.95 ; 4466.37,4365.95 4489.13,4365.95 cw(c4489.13,4340.95) 4514.13,4340.95 4514.13,4316.3 cw(c4489.13,4316.3) 4489.13,4291.3 ; 4489.12,3932.89 4489.12,3932.89 ; 4489.13,4185.46 4489.13,4185.46 ; 4489.13,4291.3 4489.13,4291.3 ; 4514.15,4554.37 4514.15,4554.37
  text "M1 Board Outline" at 577,-858.49 h60
M2 Board Dimensions:
  text "X3" at 4261,4078 h60 r90
  text "X3" at 4593,3426 h60
  text "X24" at 7191,3261 h60
  text "X12" at 3883,3246 h60
  text "M2 Board Dimensions" at 577,-858.49 h60
M3 3D STEP Top:
  text ".Layer_Name" at 577,-858.49 h60
M4 3D STEP Bottom:
  text ".Layer_Name" at 577,-858.49 h60
M5 Assembly Top:
  lines w4: 5723,4363 5752,4363
  lines w10: -287.5,-917.17 6312.5,-917.17 ; -287.5,-713.83 6314.5,-713.83 ; -287.5,-510.5 -287.5,-1120.5 3717.5,-1120.5 6314.5,-1120.5 6314.5,-510.5 -287,-510.5 -287,-1120.5 1288.5,-1120.5 ; 2177.5,-1120.5 2177.5,-510.5 ; 3444.5,-713.83 3444.5,-510.5 ; 4284.5,-713.83 4284.5,-510.5 ; 4906.5,-1127 4906.5,-924.17
  text "COMPONENTS MARKED 'DNP' SHOULD NOT BE POPULATED." at -159.85,-299.74 h60
  text "ASSEMBLY VARIANT:" at -160.35,-415.24 h60
  text ".VariantName" at 875.65,-415.24 h60
  text "PCB VIEWED FROM TOP SIDE" at -228.5,-655.67 h60
  text "BOARD #:" at 2248,-655.67 h60
  text ".PRJ_Number" at 2793.5,-655.67 h60
  text "REV:" at 3638,-655.67 h60
  text ".PCB_Rev" at 3929.5,-655.67 h60
  text "SVN REV:" at 4476,-655.67 h60
  text ".VersionControl_RevNumber" at 4982,-655.67 h60
  text ".Layer_Name" at 538.89,-854.26 h60
  text "TID #:" at 2248,-859 h60
  text ".TID" at 2793.5,-859 h60
  text "PLOT NAME =" at -228.5,-1064.34 h60
  text ".plot_File_Name" at 577,-1064.34 h60
  text "GENERATED    :" at 2250,-1064.34 h60
  text ".Print_Date" at 3119.5,-1064.34 h60
  text ".Print_Time" at 3848.5,-1064.34 h60
  text "TEXAS INSTRUMENTS" at 5113,-1064.34 h60
M6 Assembly Bottom:
  lines w10: -288,-714.33 6314,-714.33 ; -286,-917.67 6314,-917.67 ; 1120,-1127.5 1120,-924.67 ; 1742,-714.33 1742,-511 ; 2582,-714.33 2582,-511 ; 3849,-1121 3849,-511 ; 4738,-1121 6313.5,-1121 6313.5,-511 -288,-511 -288,-1121 2309,-1121 6314,-1121 6314,-511
  text "COMPONENTS MARKED 'DNP' SHOULD NOT BE POPULATED." at 6102,-318 h60
  text ".VariantName" at 5058,-434 h60
  text "ASSEMBLY VARIANT:" at 6097,-434 h60
  text ".VersionControl_RevNumber" at 1035.5,-656.17 h60
  text "SVN REV:" at 1541.5,-656.17 h60
  text ".PCB_Rev" at 2088,-656.17 h60
  text "REV:" at 2379.5,-656.17 h60
  text ".PRJ_Number" at 3224,-656.17 h60
  text "BOARD #:" at 3769.5,-656.17 h60
  text "PCB VIEWED FROM BOTTOM SIDE" at 6246,-656.17 h60
  text ".Layer_Name" at 1514.22,-848.89 h60
  text ".TID" at 3224,-859.5 h60
  text "TID #:" at 3769.5,-859.5 h60
  text "TEXAS INSTRUMENTS" at 904.5,-1064.84 h60
  text ".Print_Time" at 2169,-1064.84 h60
  text ".Print_Date" at 2898,-1064.84 h60
  text "GENERATED    :" at 3767.5,-1064.84 h60
  text ".plot_File_Name" at 5440.5,-1064.84 h60
  text "PLOT NAME =" at 6246,-1064.84 h60
M10 Fab Notes:
  drawing of 256 lines, arcs and shapes, not listed
  text "2" at 3215,8061 h70
  text "1" at 739.84,8036.5 h70
  text "3" at 5724.84,8036.5 h70
  text "4" at 8231.51,8036.5 h70
  text "5" at 10730.5,8036.5 h70
  text "6" at 13235.5,8036.5 h70
  text "A" at -416.5,6893.5 h70
  text "A" at 14383.5,6893.5 h70
  text "IMPEDANCE SPECIFICATIONS" at 3734.73,6612.91 h82.24
  text "IMPEDANCE SPECIFICATIONS" at 3734.73,6612.91 h82.24
  text "DESIGN INFORMATION" at 12391.15,6364.21 h60
  text "SL#" at 3623.7,6325.07 h82.24
  text "SL#" at 3623.7,6325.07 h82.24
  text "TYPE" at 4762.75,6325.07 h82.24
  text "TYPE" at 4762.75,6325.07 h82.24
  text "LAYER" at 5963.48,6325.07 h82.24
  text "LAYER" at 5963.48,6325.07 h82.24
  text "TRACEWIDTH(Mils)" at 6650.2,6325.07 h82.24
  text "TRACEWIDTH(Mils)" at 6650.2,6325.07 h82.24
  text "SPACING(Mils)" at 8003.08,6325.07 h82.24
  text "SPACING(Mils)" at 8003.08,6325.07 h82.24
  text "IMPEDANCE(Ohms)" at 9150.36,6325.07 h82.24
  text "IMPEDANCE(Ohms)" at 9150.36,6325.07 h82.24
  text "REF LAYER" at 10416.88,6325.07 h82.24
  text "REF LAYER" at 10416.88,6325.07 h82.24
  text "3.5" at 12769.13,6238.04 h60
  text "MIN. TRACK WIDTH:" at 11746.59,6232.09 h60
  text "MIL" at 12997.59,6232.09 h60
  text "L02,L07" at 10572.95,6143.02 h82.24
  text "L1,L8" at 5993.27,6139.91 h82.24
  text "5.50" at 7141.18,6136.73 h82.24
  text "---" at 8395.37,6136.73 h82.24
  text "50" at 9608.44,6136.73 h82.24
  text "MICROSTRIP" at 3942.46,6127.2 h82.24
  text "01" at 3656.6,6119.46 h82.24
  text "01" at 3656.6,6119.46 h82.24
  text "MIN. CLEARANCE:" at 11746.59,6107.96 h60
  text "3.5" at 12782.83,6107.96 h60
  text "MIL" at 12997.59,6107.96 h60
  text "L07" at 10573.5,6003.62 h82.24
  text "4.5" at 8454.58,6000.21 h82.24
  text "L8" at 5993.27,5995.99 h82.24
  text "EDGE COUPLED MICROSTRIP" at 3943.7,5995.4 h82.24
  text "4.00" at 7141.18,5992.81 h82.24
  text "90" at 9608.44,5992.81 h82.24
  text "02" at 3656.76,5986.5 h82.24
  text "MIN. VIA PAD SIZE:" at 11746.59,5983.83 h60
  text "18" at 12812.84,5983.84 h60
  text "MIL" at 12997.59,5983.83 h60
  text "7" at 8500.11,5863.02 h82.24
  text "L07" at 10572.95,5855.17 h82.24
  text "0.05mm (2MIL)" at 12441.59,5853.93 h60
  text "EDGE COUPLED MICROSTRIP" at 3943.7,5851.99 h82.24
  text "L8" at 5993.27,5852.06 h82.24
  text "4.00" at 7141.18,5848.89 h82.24
  text "100" at 9608.44,5848.89 h82.24
  text "MINIMUM ANNULAR RING" at 11417.36,5845.71 h60
  text "EXTERNAL" at 13149.59,5845.71 h60
  text "03" at 3656.76,5842.58 h82.24
  text "PER" at 11617.36,5735.58 h60
  text "IPC-D-275 CLASS 2 LEVEL C" at 11837.36,5735.58 h60
  text "6.1" at 8500.11,5719.1 h82.24
  text "L03,L06" at 10572.95,5711.25 h82.24
  text "EDGE COUPLED MICROSTRIP" at 3943.7,5708.06 h82.24
  text "L1,L8" at 5993.27,5708.14 h82.24
  text "4.00" at 7141.18,5704.96 h82.24
  text "120" at 9608.44,5704.96 h82.24
  text "04" at 3656.76,5698.66 h82.24
  text "MIL, HOLES" at 13325.59,5635.11 h60
  text "+/-" at 12933.13,5626.52 h60
  text "+/-" at 13787.13,5626.52 h60
  text "REGISTRATION TOLERANCES:" at 11417.36,5625.46 h60
  text "METAL" at 12617.13,5625.46 h60
  text "5" at 13193.33,5625.46 h60
  text "3" at 14026.33,5625.46 h60
  text "MIL" at 14142.59,5625.46 h60
  text "L02/04,L05/07" at 10304.06,5574.08 h82.24
  text "STRIPLINE" at 3939.49,5569.53 h82.24
  text "L3,L6" at 5996.6,5568 h82.24
  text "4.2" at 7141.18,5560.16 h82.24
  text "---" at 8395.37,5560.16 h82.24
  text "50" at 9608.44,5560.16 h82.24
  text "05" at 3656.76,5554.73 h82.24
  text "HOLE SIZE TOLERANCE (UNLESS OTHERWISE SPECIFIED):" at 11417.36,5527.14 h60
  text "+/-" at 13787.13,5524.27 h60
  text "3" at 14026.33,5523.21 h60
  text "MIL" at 14142.59,5523.2 h60
  text "L6" at 5996.6,5424.08 h82.24
  text "EDGE COUPLED STRIPLINE" at 3941.56,5421.85 h82.24
  text "L05/07" at 10461,5422.2 h82.24
  text "6" at 8488.3,5420.35 h82.24
  text "4.00" at 7141.18,5416.24 h82.24
  text "90" at 9608.44,5416.24 h82.24
  text "06" at 3656.76,5410.81 h82.24
  text "MATERIAL:" at 11342.59,5385.56 h60
  text "EDGE COUPLED STRIPLINE" at 3939.49,5284.58 h82.24
  text "L02/04" at 10461,5283.2 h82.24
  text "L3" at 5996.6,5280.16 h82.24
  text "8" at 8488.3,5276.43 h82.24
  text "3.5" at 7141.18,5272.31 h82.24
  text "100" at 9608.44,5272.31 h82.24
  text "07" at 3664.83,5269.22 h82.24
  text "FR-4 High Tg" at 12329.03,5257.03 h60
  text "X" at 12176.59,5254.04 h60
  text "FR-408" at 11763.59,5244.53 h60
  text "OTHER" at 13251.59,5244.53 h60
  text "L1" at 6001.5,5144.87 h82.24
  text "12" at 7149.41,5141.69 h82.24
  text "50" at 9616.67,5141.69 h82.24
  text "10" at 8447.03,5135.03 h82.24
  text "L03" at 10584.7,5133.69 h82.24
  text "COPLANAR" at 3950.69,5132.16 h82.24
  text "08" at 3664.83,5119.09 h82.24
  text "64 MIL (1.62mm) +/-10%" at 12083.69,5101.5 h60
  text "X" at 11963.59,5099.04 h60
  text "THICKNESS:" at 11417.36,5093.27 h60
  text "OTHER" at 13368.59,5093.27 h60
  text "TOLERANCE:" at 11417.36,4954.96 h60
  text "X" at 12265.59,4954.96 h60
  text "ANSI IPC-6012 TYPE 3 CLASS 2" at 12443.6,4954.96 h60
  text "OTHER +/-" at 12443.59,4810.77 h60
  text "BOW & TWIST:" at 11417.36,4665.58 h60
  text "X" at 12265.59,4665.58 h60
  text "ANSI IPC-6012 TYPE 3 CLASS 2" at 12443.6,4665.58 h60
  text "OTHER +/-" at 12443.59,4518.89 h60
  text "B" at -416.5,4513.5 h70
  text "B" at 14383.5,4513.5 h70
  text "DRILLING:" at 11342.59,4388.27 h60
  text "NC_DRILL FILES" at 13103.59,4283.08 h60
  text "REFERENCE:" at 11417.36,4279.14 h60
  text "X" at 12074.59,4279.04 h60
  text "AS SHOWN" at 12252.59,4279.14 h60
  text "X" at 12975.59,4279.14 h60
  text "OTHER" at 13401.59,4136.89 h60
  text "PTH COPPER THICKNESS:" at 11417.03,4133.36 h60
  text "X" at 12556.27,4133.36 h60
  text "20-30 um" at 12684.27,4133.36 h60
  text "BOARD FINISH:" at 11342.59,3985.76 h60
  text "SILKSCREEN:" at 11497.81,3875.64 h60
  text "X" at 12455.59,3875.64 h60
  text "TOP" at 12572.59,3875.64 h60
  text "X" at 12965.59,3875.64 h60
  text "BOTTOM" at 13083.59,3875.64 h60
  text "SILKSCREEN COLOR:" at 11497.81,3720.45 h60
  text "X" at 12454.59,3720.45 h60
  text "WHITE" at 12572.59,3720.45 h60
  text "OTHER" at 13083.59,3720.45 h60
  text "X" at 12585.59,3577 h60
  text "RED" at 12703.59,3577 h60
  text "OTHER" at 13321.59,3577 h60
  text "SOLDER RESIST COLOR:" at 11497.81,3570.13 h60
  text "X" at 12585.59,3422.75 h60
  text "MATTE" at 12703.59,3422.75 h60
  text "SEMI-GLOSS" at 13321.13,3422.11 h60
  text "IMMERSION GOLD (ENIG)" at 12403.59,3249.98 h60
  text "ENEPIG" at 13741.13,3242.75 h60
  text "SURFACE FINISH:" at 11342.59,3241.75 h60
  text "X" at 12225.59,3241.75 h60
  text "IMM. TIN/SILVER OR EQUIV" at 11672.13,3104.44 h60
  text "OTHER" at 13103.59,3100.5 h60
  text "ARRAY/PANEL:" at 11342.59,2945.12 h60
  text "CUT AND TRIM PER M1 BOARD OUTLINE" at 12403.59,2936.9 h60
  text "X" at 12215,2804 h60
  text "N.C. ROUTE" at 12403.59,2800.94 h60
  text "V. SCORE" at 13269.59,2800.94 h60
  text "CERTIFICATION:" at 11342.59,2671.81 h60
  text "MATERIALS AND WORKMANSHIP FOR ALL PCBS" at 12067.59,2671.81 h60
  text "TO MEET OR EXCEED THE REQUIREMENTS OF:" at 12067.59,2577.75 h60
  text "X" at 11705.1,2449.12 h60
  text "ANSI IPC-A-600F CLASS ->" at 11833.09,2449.12 h60
  text "X" at 13481.1,2449.12 h60
  text "2" at 13591.09,2449.12 h60
  text "1" at 13276.09,2447.62 h60
  text "3" at 13945.09,2447.62 h60
  text "X" at 12517.1,2301.43 h60
  text "RoHS" at 12645.09,2301.43 h60
  text "OTHER" at 13289.49,2301.43 h60
  text "PER ORDER" at 13686.55,2301.43 h60
  text "ALL BOARDS MUST MEET OR EXCEED UL94-V0 REQUIREMENTS." at 11370.13,2147.6 h60
  text "C" at -416.5,2138.5 h70
  text "C" at 14383.5,2138.5 h70
  text "PCB MUST BEAR THE UL94V-0 UL REGISTERED MATERIAL ID NUMBER" at 11370.13,2031.54 h60
  text "ADDITIONAL REQUIREMENTS:" at 11342.59,1862.12 h60
  text "MICROSECTION:" at 11417.36,1754.99 h60
  text "YES" at 12323.09,1754.99 h60
  text "REQUIRED" at 13184.59,1610.66 h60
  text "BARE BOARD ELEC. TEST:" at 11417.36,1607.8 h60
  text "NONE" at 12723.09,1607.8 h60
  text "X" at 13066.59,1607.8 h60
  text "PER ORDER" at 13776.59,1607.8 h60
  text "XX MIL VIAS REQUIRE NON-CONDUCTIVE FILL AND PLANARIZE" at 11585.51,1402.85 h59
  text "XX MIL VIAS REQUIRE CONDUCTIVE FILL AND PLANARIZE" at 11593.51,1298.88 h60
  text "X" at 11460.14,1142.4 h60
  text "OUTER XX MIL TRACES REQUIRE 50 OHM SINGLE-ENDED IMPEDANCE" at 11592.52,1135.49 h58
  text "X" at 11462.02,980.86 h60
  text "LAYER 2 & 3 (INNER LAYERS) XX MIL WIDE, XX MIL SPACE / TRACES REQUIRE 100 OHM DIFFERENTIAL IMPEDANCE" at 11584.52,899.78 h60
  text "PROJECT TITLE:" at 11343.5,277.5 h45
  text ".PRJ_Title" at 11393.5,144.17 h70
  text "DESIGNED FOR:" at 11343.5,-23.5 h45
  text ".PRJ_Customer" at 11393.5,-163.5 h70
  text "D" at -416.5,-231.5 h70
  text "D" at 14383.5,-231.5 h70
  text "FILE NAME:" at 11343.5,-323.5 h45
  text ".PCB_File_Name_No_Path" at 11393.5,-443.5 h70
  text "Texas Instruments (TI) and/or its licensors do not warrant the accuracy or completeness of this specification" at 6374,-605.34 h45
  text "ENGINEER:" at 11343.5,-613.5 h45
  text "LAYOUT BY:" at 12848.5,-613.5 h45
  text "or any information contained therein. TI and/or its licensors do not warrant that this design will meet" at 6329.01,-718 h45
  text ".PRJ_Engineer" at 11393.5,-768.49 h70
  text ".PCB_Layout" at 12899,-768.49 h70
  text "the specifications, will be suitable for your application or fit for any particular purpose, or will operate in" at 6329.01,-830.67 h45
  text ".Layer_Name" at 577,-858.49 h60
  text "ALTIUM DESIGNER VERSION:" at 12848.5,-923.5 h45
  text "an implementation. TI and/or its licensors do not warrant that the design is production worthy. You should" at 6329.01,-943.33 h45
  text "completely validate and test your design implementation to confirm the system functionality for your application." at 6374,-1056 h45
  text ".print_Scale" at 11393.5,-1056.83 h70
  text ".Application_BuildNumber" at 12899,-1056.83 h70
  text "1" at 739.84,-1263.5 h70
  text "2" at 3235.5,-1263.5 h70
  text "3" at 5724.84,-1263.5 h70
  text "4" at 8231.51,-1263.5 h70
  text "5" at 10730.5,-1263.5 h70
  text "6" at 13235.5,-1263.5 h70
M11 Gerber Information:
  lines w10: -288.5,-917.67 6311.5,-917.67 ; -288.5,-714.33 6313.5,-714.33 ; -288.5,-511 -288.5,-1121 3716.5,-1121 6313.5,-1121 6313.5,-511 -288,-511 -288,-1121 1287.5,-1121 ; 2176.5,-1121 2176.5,-511 ; 3443.5,-714.33 3443.5,-511 ; 4283.5,-714.33 4283.5,-511 ; 4905.5,-1127.5 4905.5,-924.67
  text "ALL ARTWORK VIEWED FROM TOP SIDE" at -228.5,-655.67 h60
  text "BOARD #:" at 2248,-655.67 h60
  text ".PRJ_Number" at 2793.5,-655.67 h60
  text "REV:" at 3638,-655.67 h60
  text ".PCB_Rev" at 3929.5,-655.67 h60
  text "SVN REV:" at 4476,-655.67 h60
  text ".VersionControl_RevNumber" at 4982,-655.67 h60
  text "LAYER NAME =" at -228.5,-858.49 h60
  text "TID #:" at 2248,-859 h60
  text ".TID" at 2793.5,-859 h60
  text "PLOT NAME =" at -228.5,-1064.34 h60
  text ".plot_File_Name" at 577,-1064.34 h60
  text "GENERATED    :" at 2250,-1064.34 h60
  text ".Print_Date" at 3119.5,-1064.34 h60
  text ".Print_Time" at 3848.5,-1064.34 h60
  text "TEXAS INSTRUMENTS" at 5113,-1064.34 h60